# Altium PCB A4WP-PCB.PcbDoc
Units mm, origin at the board's own origin, x right, y up, seen from the top; angles counter-clockwise.
Board outline 152.4 x 101.6 mm, 2 copper layers (Top Layer, Bottom Layer); 124 components, 62 nets, 304 pads, 0 vias.
Unrouted connection lines stored in the file: 235.
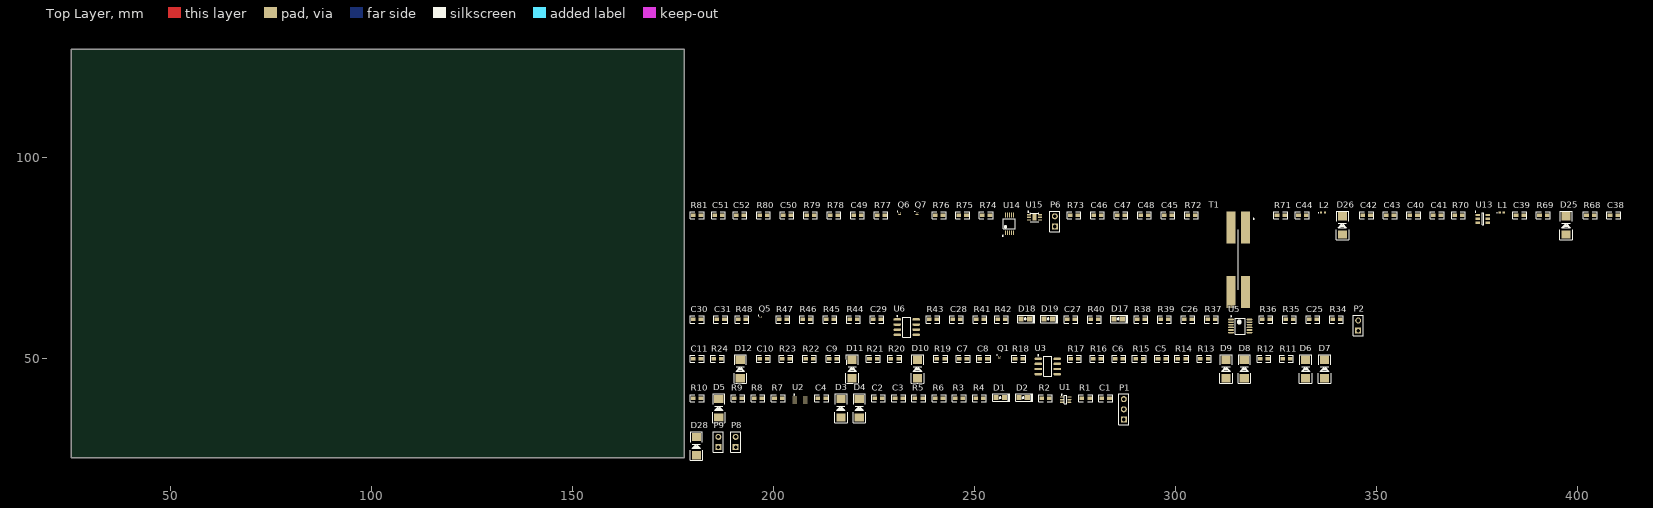
[diagram p0: Top Layer view]
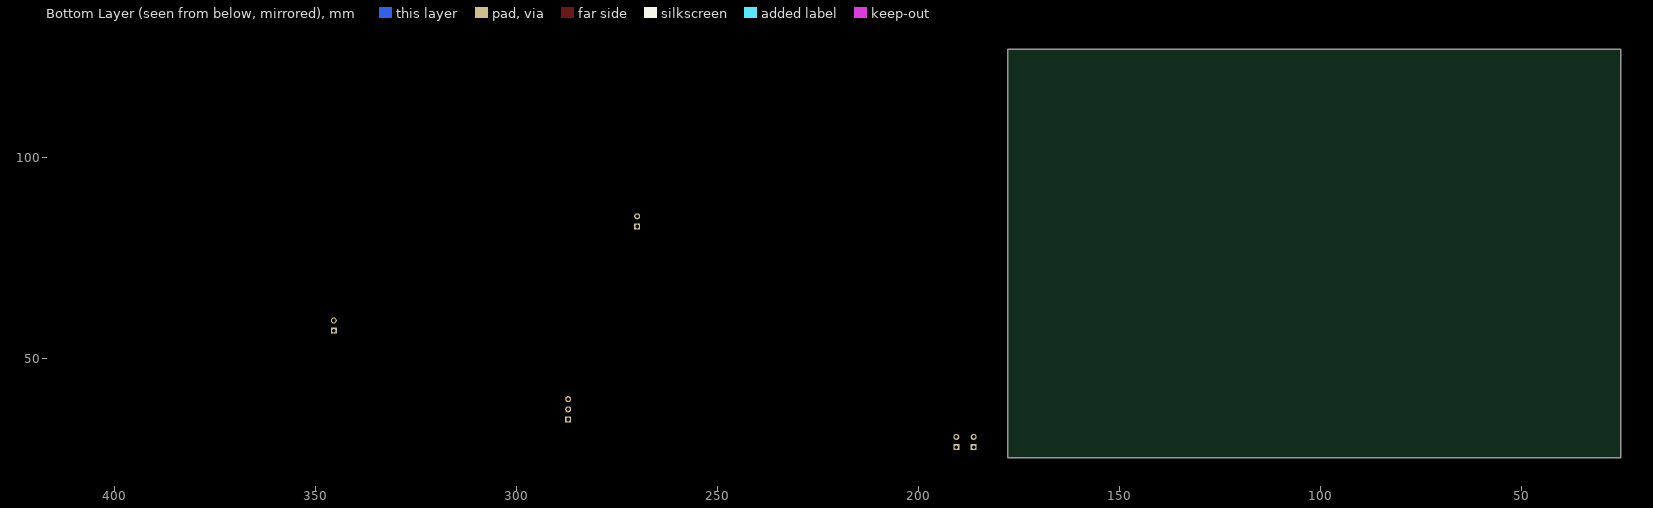
[diagram p1: Bottom Layer view, seen from below]

## Layer stack, top to bottom
Top Layer: signal copper 0.0356
Dielectric: dielectric 0.32, FR-4, Dk 4.8
Bottom Layer: signal copper 0.0356

## Board outline
25.4,25.4 177.8,25.4 177.8,127 25.4,127

## Design rules (kind name [scope] priority, off if disabled: settings)
Clearance [All] p1: gap=0.152
HoleToHoleClearance [All] p1: gap=0.152 allowstackedmicrovias=TRUE
PolygonConnect [All] p1: connectstyle=Relief reliefconductorwidth=0.254 reliefentries=4 polygonreliefangle="90 Angle"
RoomDefinition U_PowerSupport [InComponentClass('U_PowerSupport')] p1: confinementstyle=ConfineIn formatcopy=TRUE lockcomponents=FALSE outline 178.943,62.357 411.861,62.357 411.861,89.535 178.943,89.535
RoomDefinition "U_MeasurevoltageCurrent1 " [InComponentClass('U_MeasurevoltageCurrent1 ')] p2: confinementstyle=ConfineIn formatcopy=TRUE lockcomponents=FALSE outline 178.943,55.118 347.345,55.118 347.345,63.627 178.943,63.627
RoomDefinition U_ControlPower [InComponentClass('U_ControlPower')] p3: confinementstyle=ConfineIn formatcopy=TRUE lockcomponents=FALSE outline 178.943,43.561 338.963,43.561 338.963,53.848 178.943,53.848
RoomDefinition U_ControlManage [InComponentClass('U_ControlManage')] p4: confinementstyle=ConfineIn formatcopy=TRUE lockcomponents=FALSE outline 178.943,33.401 288.671,33.401 288.671,44.069 178.943,44.069
RoomDefinition top [InComponentClass('top')] p5: confinementstyle=ConfineIn formatcopy=TRUE lockcomponents=FALSE outline 178.943,24.384 192.532,24.384 192.532,34.671 178.943,34.671
RoutingVias [All] p1: holewidth=0.711 width=1.27 viastyle="Through Hole" minholewidth=0.711 minwidth=1.27 maxholewidth=0.711 maxwidth=1.27
SilkscreenOverComponentPads [All] p1: minsilkscreentomaskgap=0
SolderMaskExpansion [All] p1: expansion=0.102
Width [All] p1: maxlimit=1.27 minlimit=0.152 preferedwidth=0.254
26 further rules are at their usual default settings.

## Classes and differential pairs
component class U_PowerSupport: C38 C39 C40 C41 C42 C43 C44 C45 C46 C47 C48 C49 C50 C51 C52 D25 D26 L1 L2 P6 Q6 Q7 R68 R69 R70 R71 R72 R73 R74 R75 R76 R77 R78 R79 R80 R81 T1 U13 U14 U15
component class "U_MeasurevoltageCurrent1 ": C25 C26 C27 C28 C29 C30 C31 D17 D18 D19 P2 Q5 R34 R35 R36 R37 R38 R39 R40 R41 R42 R43 R44 R45 R46 R47 R48 U5 U6
component class U_ControlPower: C5 C6 C7 C8 C9 C10 C11 D6 D7 D8 D9 D10 D11 D12 Q1 R11 R12 R13 R14 R15 R16 R17 R18 R19 R20 R21 R22 R23 R24 U3
component class U_ControlManage: C1 C2 C3 C4 D1 D2 D3 D4 D5 P1 R1 R2 R3 R4 R5 R6 R7 R8 R9 R10 U1 U2
component class top: D28 P8 P9

## Components (designator, comment, footprint, x,y, rotation, side; value= is the part's Value field where it differs from the comment)
C1 "100n/50V" 0603 282.575,40.259 r0 top
C2 "100n/25V" 0603 226.06,40.259 r0 top
C3 "100n/25V" 0603 231.14,40.259 r0 top
C4 "100n/50V" 0603 211.963,40.259 r0 top
C5 "10n/100V" 0603 296.545,50.038 r0 top
C6 "100n/25V" 0603 285.877,50.038 r0 top
C7 "1n/50V" 0603 247.142,50.038 r0 top
C8 "22p/50V" 0603 252.222,50.038 r0 top
C9 "1n/50V" 0603 214.757,50.038 r0 top
C10 "1n/50V" 0603 197.485,50.038 r0 top
C11 "22p/50V" 0603 180.975,50.038 r0 top
C25 "2.2u/100V" 0603 334.137,59.817 r0 top
C26 "22p/50V" 0603 303.022,59.817 r0 top
C27 "47n/25V" 0603 273.939,59.817 r0 top
C28 "100n/25V" 0603 245.491,59.817 r0 top
C29 "1n/50V" 0603 225.679,59.817 r0 top
C30 "1n/50V" 0603 180.975,59.817 r0 top
C31 "1n/50V" 0603 186.817,59.817 r0 top
C38 "1u/25V" 0603 408.94,85.725 r0 top
C39 "22n/100V" 0603 385.572,85.725 r0 top
C40 "1u/25V" 0603 359.156,85.725 r0 top
C41 "1u/25V" 0603 364.998,85.725 r0 top
C42 "4.7u/50V" 0603 347.472,85.725 r0 top
C43 "4.7u/50V" 0603 353.314,85.725 r0 top
C44 "100n/100V" 0603 331.47,85.725 r0 top
C45 "2.2u/100V" 0603 298.069,85.725 r0 top
C46 "100n/50V" 0603 280.543,85.725 r0 top
C47 "1u/50V" 0603 286.385,85.725 r0 top
C48 "10u/50V" 0603 292.227,85.725 r0 top
C49 "100p" 0603 220.853,85.725 r0 top
C50 "1u/25V" 0603 203.327,85.725 r0 top
C51 "100n/25V" 0603 186.309,85.725 r0 top
C52 "10n/50V" 0603 191.643,85.725 r0 top
D1 "LED0" LED0805 255.397,40.386 r0 top
D2 "LED0" LED0805 261.112,40.386 r0 top
D3 "Diode BAS70" SMA 216.789,35.433 r90 top
D4 "Diode BAS70" SMA 221.361,35.433 r90 top
D5 "Diode BAS70" SMA 186.436,35.433 r90 top
D6 "Diode" SMA 332.359,45.212 r90 top
D7 "Diode" SMA 337.058,45.212 r90 top
D8 "Diode" SMA 317.119,45.212 r90 top
D9 "Diode" SMA 312.547,45.212 r90 top
D10 "Diode BAT17" SMA 235.839,45.212 r90 top
D11 "Diode" SMA 219.583,45.212 r90 top
D12 "Diode" SMA 191.77,45.212 r90 top
D17 "LED0" LED0805 284.734,59.944 r0 top
D18 "LED0" LED0805 261.62,59.944 r0 top
D19 "LED0" LED0805 267.335,59.944 r0 top
D25 "Diode" SMA 397.129,80.899 r90 top
D26 "Diode" SMA 341.503,80.899 r90 top
D28 "Diode BAS70" SMA 180.848,26.035 r90 top
L1 "Inductor" 0402-A 381.127,86.36 r0 top
L2 "Inductor" 0402-A 336.677,86.36 r0 top
P1 "Header 3" HDR1X3 287.147,34.925 r90 top
P2 "Header 2" HDR1X2 345.44,57.023 r90 top
P6 "Header 2" HDR1X2 270.002,82.931 r90 top
P8 "Header 2" HDR1X2 190.627,28.067 r90 top
P9 "Header 2" HDR1X2 186.309,28.067 r90 top
Q1 "EPC2038" BGA100P9X9-81A 256.159,50.419 r0 top
Q5 "EPC2038" BGA100P9X9-81A 196.85,60.198 r0 top
Q6 "EPC2036" BGA100P9X9-81A 231.394,86.106 r0 top
Q7 "EPC2007C" BGA100P9X9-81A 235.712,86.106 r0 top
R1 "Res1" 0603 277.622,40.259 r0 top
R2 "Res1" 0603 267.589,40.259 r0 top
R3 "Res1" 0603 246.126,40.259 r0 top
R4 "Res1" 0603 251.206,40.259 r0 top
R5 "Res1" 0603 236.093,40.259 r0 top
R6 "Res1" 0603 241.173,40.259 r0 top
R7 "Res1" 0603 201.168,40.259 r0 top
R8 "Res1" 0603 196.088,40.259 r0 top
R9 "Res1" 0603 191.135,40.259 r0 top
R10 "Res1" 0603 180.975,40.259 r0 top
R11 "Res1" 0603 327.533,50.038 r0 top
R12 "Res1" 0603 321.945,50.038 r0 top
R13 "Res1" 0603 307.086,50.038 r0 top
R14 "Res1" 0603 301.498,50.038 r0 top
R15 "Res1" 0603 290.957,50.038 r0 top
R16 "Res1" 0603 280.416,50.038 r0 top
R17 "Res1" 0603 274.828,50.038 r0 top
R18 "Res1" 0603 260.985,50.038 r0 top
R19 "Res1" 0603 241.554,50.038 r0 top
R20 "Res1" 0603 230.124,50.038 r0 top
R21 "Res1" 0603 224.79,50.038 r0 top
R22 "Res1" 0603 208.915,50.038 r0 top
R23 "Res1" 0603 203.073,50.038 r0 top
R24 "Res1" 0603 186.055,50.038 r0 top
R34 "Res1" 0603 339.979,59.817 r0 top
R35 "Res1" 0603 328.295,59.817 r0 top
R36 "Res1" 0603 322.453,59.817 r0 top
R37 "Res1" 0603 308.864,59.817 r0 top
R38 "Res1" 0603 291.338,59.817 r0 top
R39 "Res1" 0603 297.18,59.817 r0 top
R40 "Res1" 0603 279.781,59.817 r0 top
R41 "Res1" 0603 251.333,59.817 r0 top
R42 "Res1" 0603 256.667,59.817 r0 top
R43 "Res1" 0603 239.649,59.817 r0 top
R44 "Res1" 0603 219.837,59.817 r0 top
R45 "Res1" 0603 213.995,59.817 r0 top
R46 "Res1" 0603 208.153,59.817 r0 top
R47 "Res1" 0603 202.311,59.817 r0 top
R48 "Res1" 0603 192.151,59.817 r0 top
R68 "Res1" 0603 403.098,85.725 r0 top
R69 "Res1" 0603 391.414,85.725 r0 top
R70 "Res1" 0603 370.332,85.725 r0 top
R71 "Res1" 0603 326.136,85.725 r0 top
R72 "Res1" 0603 303.911,85.725 r0 top
R73 "Res1" 0603 274.701,85.725 r0 top
R74 "Res1" 0603 252.857,85.725 r0 top
R75 "Res1" 0603 247.015,85.725 r0 top
R76 "Res1" 0603 241.173,85.725 r0 top
R77 "Res1" 0603 226.695,85.725 r0 top
R78 "Res1" 0603 215.011,85.725 r0 top
R79 "Res1" 0603 209.169,85.725 r0 top
R80 "Res1" 0603 197.485,85.725 r0 top
R81 "Res1" 0603 180.975,85.725 r0 top
T1 "Trans Cupl" SOT830P245X1500-5N 315.468,74.676 r90 top
U1 "NC7SZ57" TSOP65P220X100-6N 272.669,39.878 r0 top
U2 "NC7SZ74" TSSOP50P340X100-8N 206.629,39.751 r0 top
U3 "LM393" SO8_L 268.224,48.133 r0 top
U5 "LT2940" TSOP65P500X100-12N 316.103,58.166 r0 top
U6 "LM393" SO8_L 233.172,57.912 r0 top
U13 "MP2357" SOT95P280X100-6N 376.428,84.836 r0 top
U14 "LM3481" TSSOP50P500X100-10N 258.699,83.566 r90 top
U15 "UCC27611" QFN65P250X200X80-6N 264.922,85.217 r0 top

## Footprints (in the part's own frame and the unit in brackets; to place one, negate y for a bottom-side part, rotate by r counter-clockwise, add the part's x,y. Pads: shape width x height; smd on the part's side, far side on the other; paste and mask are expansions set on the pad)
0402-A [mm] "Chip Inductor, Body 1.0x0.5mm, IPC High Density"
  rect 0.6x0.5 smd: 1(-0.5,0) 2(0.5,0)
  silkscreen extent -1.1,-0.15 -1.1,0.15, body extent -0.55,-0.3 0.55,0.3, height 0.55
0603 [mil]
  rect 45x35 smd: 1(-35,0) 2(40,0)
  silkscreen extent -65,-35 70,35
BGA100P9X9-81A [mm]
  round 0.19 smd mask+0.05: 1(-0.225,0.225)
  oval 0.7x0.19 smd mask+0.05: 2(-0.001,-0.223)
  round 0.19 smd paste+0 mask+0.05: 3(0.225,0.225)
  silkscreen extent -0.6,0.5 -0.51,0.6
HDR1X2 [mm] "Connector; Header; 2 Position"
  rect 1.5x1.5 hole 0.9: 1(0,0)
  round 1.5 hole 0.9: 2(2.54,0)
  silkscreen extent -1.27,-1.27 3.81,1.27
HDR1X3 [mm] "Connector; Header; 3 Position"
  rect 1.5x1.5 hole 0.9: 1(0,0)
  round 1.5 hole 0.9: 2(2.54,0) 3(5.08,0)
  silkscreen extent -1.27,-1.27 6.35,1.27
LED0805 [mil]
  rect 50x50 smd: 1(0,0) 2(80,0)
  silkscreen extent -35,-35 134,35
QFN65P250X200X80-6N [mm] "QFN, 6-Leads, Body 2.1x2.1mm (max), Pitch 0.65mm, IPC Medium Density"
  rect 1x0.3 smd: 1(-1.4,0.65) 2(-1.4,0) 3(-1.4,-0.65) 4(1.4,-0.65) 5(1.4,0) 6(1.4,0.65)
  rect 1x1.7 smd: 7(0,0)
  silkscreen extent -1.7,-1.07 1.05,1.5, body extent -1.05,-1.05 1.05,1.05, height 0.8
SMA [mil]
  rect 80x90 smd: 1(0,0) 2(180,0)
  silkscreen extent -50,-60 230,60
SO8_L [mm] "SOIC, 8-Leads, Body 4.9x3.9mm, Pitch 1.27mm, IPC High Density"
  oval 1.9x0.6 smd: 1(-2.35,1.905) 2(-2.35,0.635) 3(-2.35,-0.635) 4(-2.35,-1.905) 5(2.35,-1.905) 6(2.35,-0.635) 7(2.35,0.635) 8(2.35,1.905)
  silkscreen extent -2.47,-2.5 1,2.88, body extent -2,-2.5 2,2.5, height 1.75
SOT95P280X100-6N [mm] "SOT23, 6-Leads, Body 3.0x3.0mm (max), Pitch 0.95mm, IPC Medium Density"
  rect 1.15x0.6 smd: 1(-1.25,0.95) 2(-1.25,0) 3(-1.25,-0.95) 4(1.25,-0.95) 5(1.25,0) 6(1.25,0.95)
  silkscreen extent -1.93,-1.5 0.2,1.88, body extent -0.85,-1.5 0.85,1.5, height 1
SOT830P245X1500-5N [mm] "SOT23, 5-Leads, Body 15.0x2.6mm (max), Pitch 8.30mm, IPC Medium Density"
  rect 8x2.3 smd: 1(8,-1.927) 2(8,1.673) 3(-8,1.673) 4(-8,-1.927)
  silkscreen extent -7.5,-4.09 10.29,-0.08, body extent -7.5,-7.63 7.5,7.37, height 15
TSOP65P220X100-6N [mm] "TSOP, 6-Leads, Body 2.1x1.3mm (max), Pitch 0.65mm, IPC Medium Den"
  oval 1x0.35 smd: 1(-0.925,0.65) 2(-0.925,0) 3(-0.925,-0.65) 4(0.925,-0.65) 5(0.925,0) 6(0.925,0.65)
  silkscreen extent -1.14,-1.05 0.3,1.39, body extent -0.65,-1.05 0.65,1.05, height 1
TSOP65P500X100-12N [mm] "TSOP, 12-Leads, Body 4.0x3.0mm (max), Pitch 0.65mm, IPC Medium Density"
  oval 1.4x0.4 smd: 1(-2.3,1.625) 2(-2.3,0.975) 3(-2.3,0.325) 4(-2.3,-0.325) 5(-2.3,-0.975) 6(-2.3,-1.625) 7(2.3,-1.625) 8(2.3,-0.975) 9(2.3,-0.325) 10(2.3,0.325) 11(2.3,0.975) 12(2.3,1.625)
  silkscreen extent -2.42,-2 1.25,2.57, body extent -1.5,-2 1.5,2, height 1
TSSOP50P340X100-8N [mm] "TSSOP, 8-Leads, Body 2.0x2.3mm (max), Pitch 0.50mm, IPC Medium Den"
  oval 1.2x0.3 smd: 1(-1.3,0.75) 2(-1.3,0.25) 3(-1.3,-0.25) 4(-1.3,-0.75) 5(1.3,-0.75) 6(1.3,-0.25) 7(1.3,0.25) 8(1.3,0.75)
  silkscreen extent -1.59,1.26 -1.34,1.51, body extent -1.15,-1 1.15,1, height 1
TSSOP50P500X100-10N [mm] "TSSOP, 10-Leads, Body 3.0x3.0mm (max), Pitch 0.50mm, IPC Medium Density"
  oval 1.2x0.3 smd: 1(-2.2,1) 2(-2.2,0.5) 3(-2.2,0) 4(-2.2,-0.5) 5(-2.2,-1) 6(2.2,-1) 7(2.2,-0.5) 8(2.2,0) 9(2.2,0.5) 10(2.2,1)
  silkscreen extent -3.09,-1.5 1.32,1.72, body extent -1.5,-1.5 1.5,1.5, height 1

## Part data
C1 C2 C3 C4 C5 C6 C7 C8 C9 C10 C11 C25 C26 C27 C28 C29 C30 C31 C38 C39 C40 C41 C42 C43 C44 C45 C46 C47 C48 C49 C50 C51 C52: library part CAP1, "Capacitor"
D1 D2 D17 D18 D19: "Typical INFRARED GaAs LED"
D3 D4 D5 D28: "Silicon AF Schottky Diode for High-Speed Switching"
D6 D7 D8 D9 D11 D12 D25 D26: "Default Diode"
D10: "Silicon RF Schottky Diode for Mixer Applications in the VHF/UHF Range"
P1: "Header, 3-Pin"
P2 P6 P8 P9: "Header, 2-Pin"
Q1 Q5 Q6 Q7: library part MOSFET-N, "N-Channel MOSFET"
R1 R2 R3 R4 R5 R6 R7 R8 R9 R10 R11 R12 R13 R14 R15 R16 R17 R18 R19 R20 R21 R22 R23 R24 R34 R35 R36 R37 R38 R39 R40 R41 R42 R43 R44 R45 R46 R47 R48 R68 R69 R70 R71 R72 R73 R74 R75 R76 R77 R78 R79 R80 R81: "Resistor"
T1: "Transformer (Coupled Inductor Model)"
U1 U2: library part NC7

## Nets (pads, with @x,y where several pads share a name; then routed paths per layer and width w, separated by ;. In a path a pad name is that pad's centre, name@x,y a point inside that pad or via, vN(x,y) a via of type N, cw(c..) or ccw(c..) an arc to the next point about the centre after c; other vN are vias at no path point)
"5 VGD": C46.2 C47.2 L2.2 U15.1 U15.6
5V: C1.2 C4.2 C6.1 C28.1 C40.2 C41.2 D25.1 L1.1 L2.1 P1.2 R7.2 R16.1 R42.2 R44.1 R69.1 R73.1 U1.5 U2.2 U2.7 U2.8 U3.8 U6.8
A4WPMODE: C3.1 C7.2 C30.1 D4.2 Q1.2 Q5.2 R1.1 R6.1 U1.6
GLPH: R76.1 U15.5
GLPL: Q6.2 Q7.2 R76.2 U15.4
GND: C1.1 C2.2 C3.2 C4.1 C6.2 C7.1 C8.1 C9.1 C10.1 C11.1 C25.1 C26.1 C27.2 C28.2 C29.2 C30.2 C31.2 C38.2 C40.1 C41.1 C42.1 C43.1 C44.1 C45.1 C49.1 C50.2 C51.1 C52.1 D3.1 D4.1 D5.1 D10.1 D28.1 P8.1 Q1.3 Q5.3 R3.2 R4.2 R5.2 R6.2 R9.1 R10.1 R12.2 R18.2 R19.2 R21.2 R23.2 R24.2 R37.1 R39.2 R40.1 R47.1 R48.1 R70.2 R74.1 R75.2 R80.1 R81.2 T1.2 U1.2 U2.4 U3.4 U5.6 U5.7 U6.4 U13.2 U14.5
ICOIL: D12.1
ISNS: C46.1 C47.1 Q6.3 Q7.3 R79.2 R80.2 U15.2 U15.7
NCLR: U2.5
NetC5_2: C5.2 R15.2
NetC8_2: C8.2 D10.2 R17.2 R19.1 U3.2
NetC9_2: C9.2 R16.2 R20.1 R21.1 U3.3
NetC10_2: C10.2 D11.1 R22.2 R23.1
NetC26_2: C26.2 R36.1 R40.2 U5.8
NetC29_1: C29.1 R43.1 R45.2 U6.2
NetC31_1: C31.1 R44.2 R46.1 R48.2 U6.3
NetC39_1: C39.1 L1.2 U13.6
NetC39_2: C39.2 D25.2 U13.1
NetC44_2: C44.2 R71.2 U14.10
NetC48_1: C48.1 Q6.1 Q7.1 T1.3
NetC48_2: C48.2 D26.1 T1.1
NetC49_2: C49.2 R78.2 U14.3
NetC50_1: C50.1 U14.9
NetC51_2: C51.2 R78.1
NetC52_2: C52.2 R79.1 U14.1
NetD1_1: D1.1 P1.1 R1.2
NetD1_2: D1.2 R3.1
NetD2_1: D2.1 P1.3 R2.2
NetD2_2: D2.2 R4.1
NetD5_3: D5.2 R8.1 R9.2 U3.5
NetD6_2: D6.2 D8.2 R11.2
NetD7_1: D7.1 R11.1 R12.1
NetD9_1: D9.1 R13.1 R14.1 R15.1
NetD17_1: D17.1 D18.1 R41.1
NetD17_2: D17.2 U5.1
NetD18_2: D18.2 U5.2
NetD19_1: D19.1 R42.1
NetD19_2: D19.2 R41.2 R46.2 U6.1
NetP6_1: P6.1 R75.1 U14.6
NetP6_2: P6.2 R73.2
NetQ1_1: Q1.1 R14.2 R18.1
NetQ5_1: Q5.1 R45.1 R47.2
NetR7_1: R7.1 R10.2 U3.6
NetR35_1: R35.1 U5.12
NetR37_2: R37.2 U5.5
NetR68_2: R68.2 U13.4
NetR69_2: R69.2 R70.1 U13.3
NetR72_1: R72.1 R74.2 U14.2
NetR77_2: R77.2 U15.3
NetR81_1: R81.1 U14.7
NetU2_6: U2.6 U3.7
PCMP: C27.1 R38.2 R39.1 U5.3
PMON: R22.1 R38.1 U5.4
PREDR: R77.1 U14.8
QIMODE: C2.1 D3.2 R2.1 R5.1 U1.1 U1.3
UVLO: D8.1 R20.2 U3.1
VAMP: P9.2 R8.2
VFDBK: C11.2 D7.2 D9.2 D11.2 D12.2 R24.1 U14.4
VIN: C38.1 C42.2 C43.2 D28.2 P8.2 R17.1 R68.1 R71.1 R72.2 T1.4 U13.5
VOFF: D6.1 U1.4 U2.1
VOUT: C5.1 C25.2 P9.1 R13.2 R34.1 R36.2 R43.2 U5.10
VSEPIC: C45.2 D26.2 R34.2 R35.2 U5.11
pads on no net: P2.1 P2.2 U2.3 U5.9 U6.5 U6.6 U6.7